# EAGLE board Control (EAGLE 7.2.0)
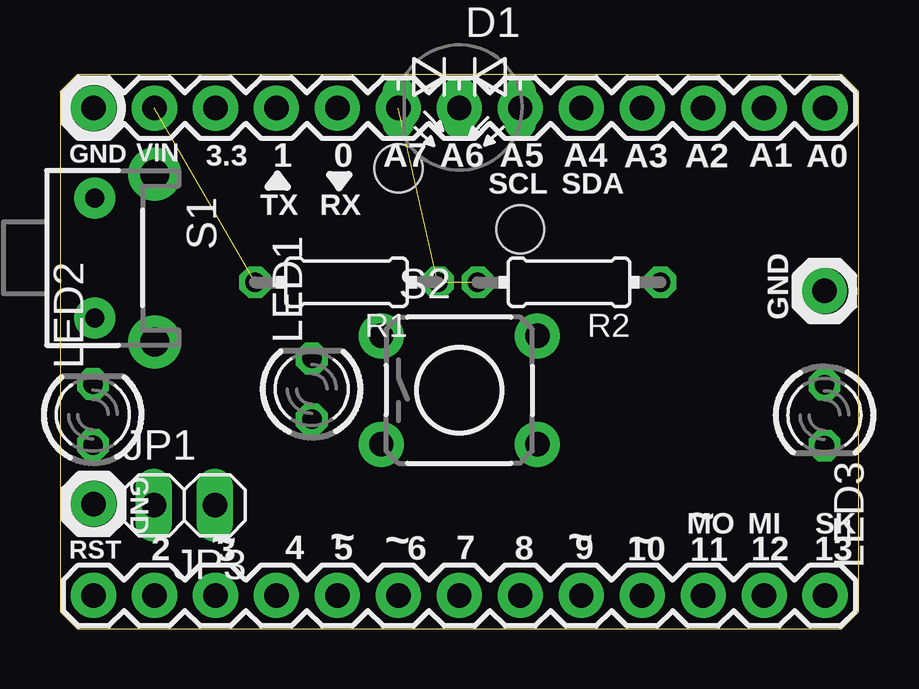
[diagram p0: board, top side]
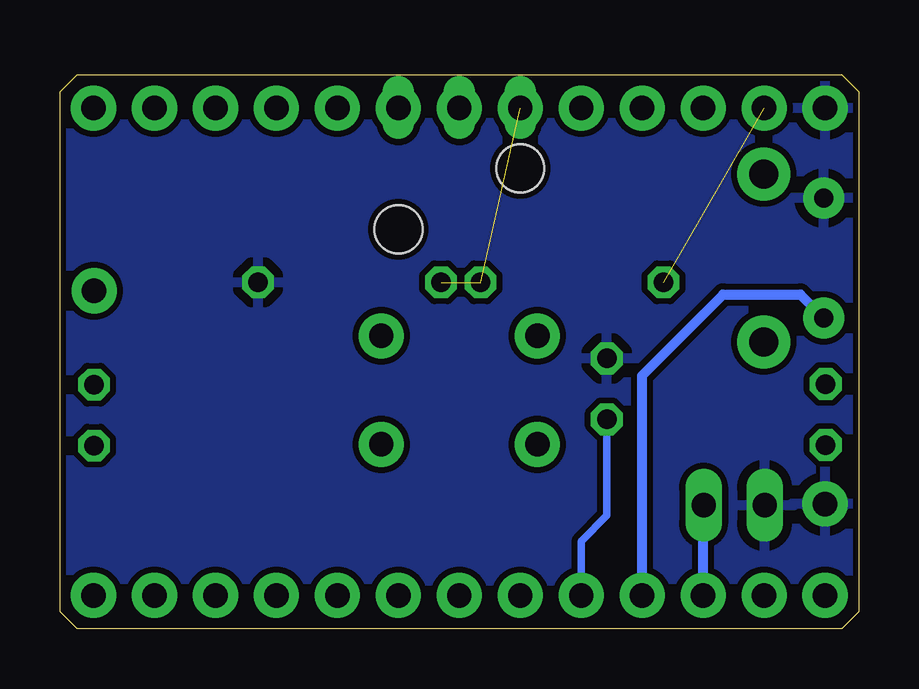
[diagram p1: board, bottom side, seen from below]

Size 33.27 x 23.11 mm. Coordinates in mm from the lower left corner, seen from the top.
Outline: 0.71,0 32.56,0 33.27,0.71 33.27,22.4 32.56,23.11 0.71,23.11 0,22.4 0,0.71 0.71,0
Copper layers (1*16): Top 0.035mm / dielectric 1.5mm / Bottom 0.035mm
Design rules "ITEADstudio_DRC *": minimum track width 6mil, minimum drill 12mil, track to track 6mil, track to pad 6mil, pad to pad 6mil, via to via 6mil, smd to smd 0mil, copper to edge 10mil, drill to drill 10mil, minimum pad ring 10mil, minimum via ring 6mil, stop-mask expansion 2mil, vias tented up to drill 100mil, thermal gap 15mil
Net classes: 1 power: width 0.381 mm, clearance 0.254 mm

## Footprints (pad centres in the part's own frame; a part is rotated, then mirrored left to right if it is on the bottom)
1X13 = drill 1.016 pad 1.88: 1 0,0; 2 2.54,0; 3 5.08,0; 4 7.62,0; 5 10.16,0; 6 12.7,0; 7 15.24,0; 8 17.78,0; 9 20.32,0; 10 22.86,0; 11 25.4,0; 12 27.94,0; 13 30.48,0
DUOLED = drill 0.813 long: A1 -3.81,0; A2 1.27,0; K -1.27,0 | hole 2: 1.27,2.54; -3.81,5.08
1X01 = drill 1.016 pad 1.88: 1 0,0
1X02 = drill 1.016 long: 1 -1.27,0; 2 1.27,0
LED3MM = drill 0.813 octagon: A -1.27,0; K 1.27,0
0204/7 = drill 0.813 octagon: 1 -3.81,0; 2 3.81,0
TACTILE-PTH-SIDEEZ = drill 0.8 pad 1.7: 1 -2.5,0; 2 2.5,0 | drill 1.2 pad 2.2: ANCHOR1 -3.5,2.5; ANCHOR2 3.5,2.5
TACTILE-PTH = drill 1.016 pad 1.88: 1 -3.251,2.261; 2 3.251,2.261; 3 -3.251,-2.261; 4 3.251,-2.261

## Placement (x,y rotation side)
ANALOGSIDE  M13  [1X13]  31.88,21.72 180 top
D1  [DUOLED]  15.37,21.74 180 top
DIGITALSIDE  M13  [1X13]  31.88,1.4 180 top
JP1  M01PTH  [1X01]  1.4,5.21 0 top
JP2  M01PTH  [1X01]  31.85,14.1 0 top
JP3  [1X02]  5.18,5.16 180 top
LED1  [LED3MM]  10.49,10.01 90 top
LED2  [LED3MM]  1.37,8.94 90 top
LED3  [LED3MM]  31.85,8.92 270 top
R1  [0204/7]  11.94,14.45 180 top
R2  [0204/7]  21.21,14.45 180 top
S1  SWITCH-MOMENTARY-2SIDE_EZ  [TACTILE-PTH-SIDEEZ]  1.45,15.47 270 top
S2  [TACTILE-PTH]  16.64,9.96 0 top

## Library data of the parts
ANALOGSIDE DIGITALSIDE JP1 JP2 = SparkFun-Connectors
D1 = special
JP3 = pinhead
LED1-LED3 = led
R1 R2 = rcl
S1 = SparkFun-Electromechanical
S2 = SparkFun-Retired

## Nets
AGND [power]: JP1.1 JP3.2
GND [power]: ANALOGSIDE.13 LED1.K R2.1 S1.1
GND1: D1.A2
N$1: DIGITALSIDE.10 S1.2
N$2: DIGITALSIDE.11 JP3.1
N$3: DIGITALSIDE.9 LED1.A
N$5: ANALOGSIDE.12 R1.2
N$6: ANALOGSIDE.8 R1.1 R2.2
N$8: D1.K
N$9: D1.A1

## Tracks (layer width: path | path; a pad name or v marks a point on that pad's centre or on a via)
AGND
  pour Bottom: -0.23,23.75 33.78,23.75 33.78,-0.46 -0.3,-0.46 -0.3,23.72
GND
  pour Bottom: -0.13,23.19 33.45,23.19 33.45,-0.18 -0.13,-0.18
N$1
  Bottom 0.406: DIGITALSIDE.10 9.02,10.57 5.64,13.95 2.42,13.95 S1.2
N$2
  Bottom 0.406: DIGITALSIDE.11 6.48,5.13 JP3.1
N$3
  Bottom 0.305: DIGITALSIDE.9 11.56,3.66 10.49,4.72 LED1.A
N$5  (1 unrouted)
N$6  (2 unrouted)

## Text on the board
_tsilk: VIN | 3.3 | 1 | 0 | A7 | A6 | A5 | A4 | A3 | A2 | A1 | GND | A0 | TX | RX | SCL | SDA | GND | GND | 2 | 3 | 4 | 5 | 6 | 7 | 8 | 9 | 10 | MO | ~ | 11 | MI | 12 | SK | 13 | RST | ~ | ~ | ~ | ~ | ~